# Altium PCB 00.Main.PcbDoc
Units mm, origin at the board's own origin, x right, y up, seen from the top; angles counter-clockwise.
Board outline 141 x 110 mm, 2 copper layers (Top Layer, Bottom Layer); 14 components, 21 nets, 69 pads, 14 vias.
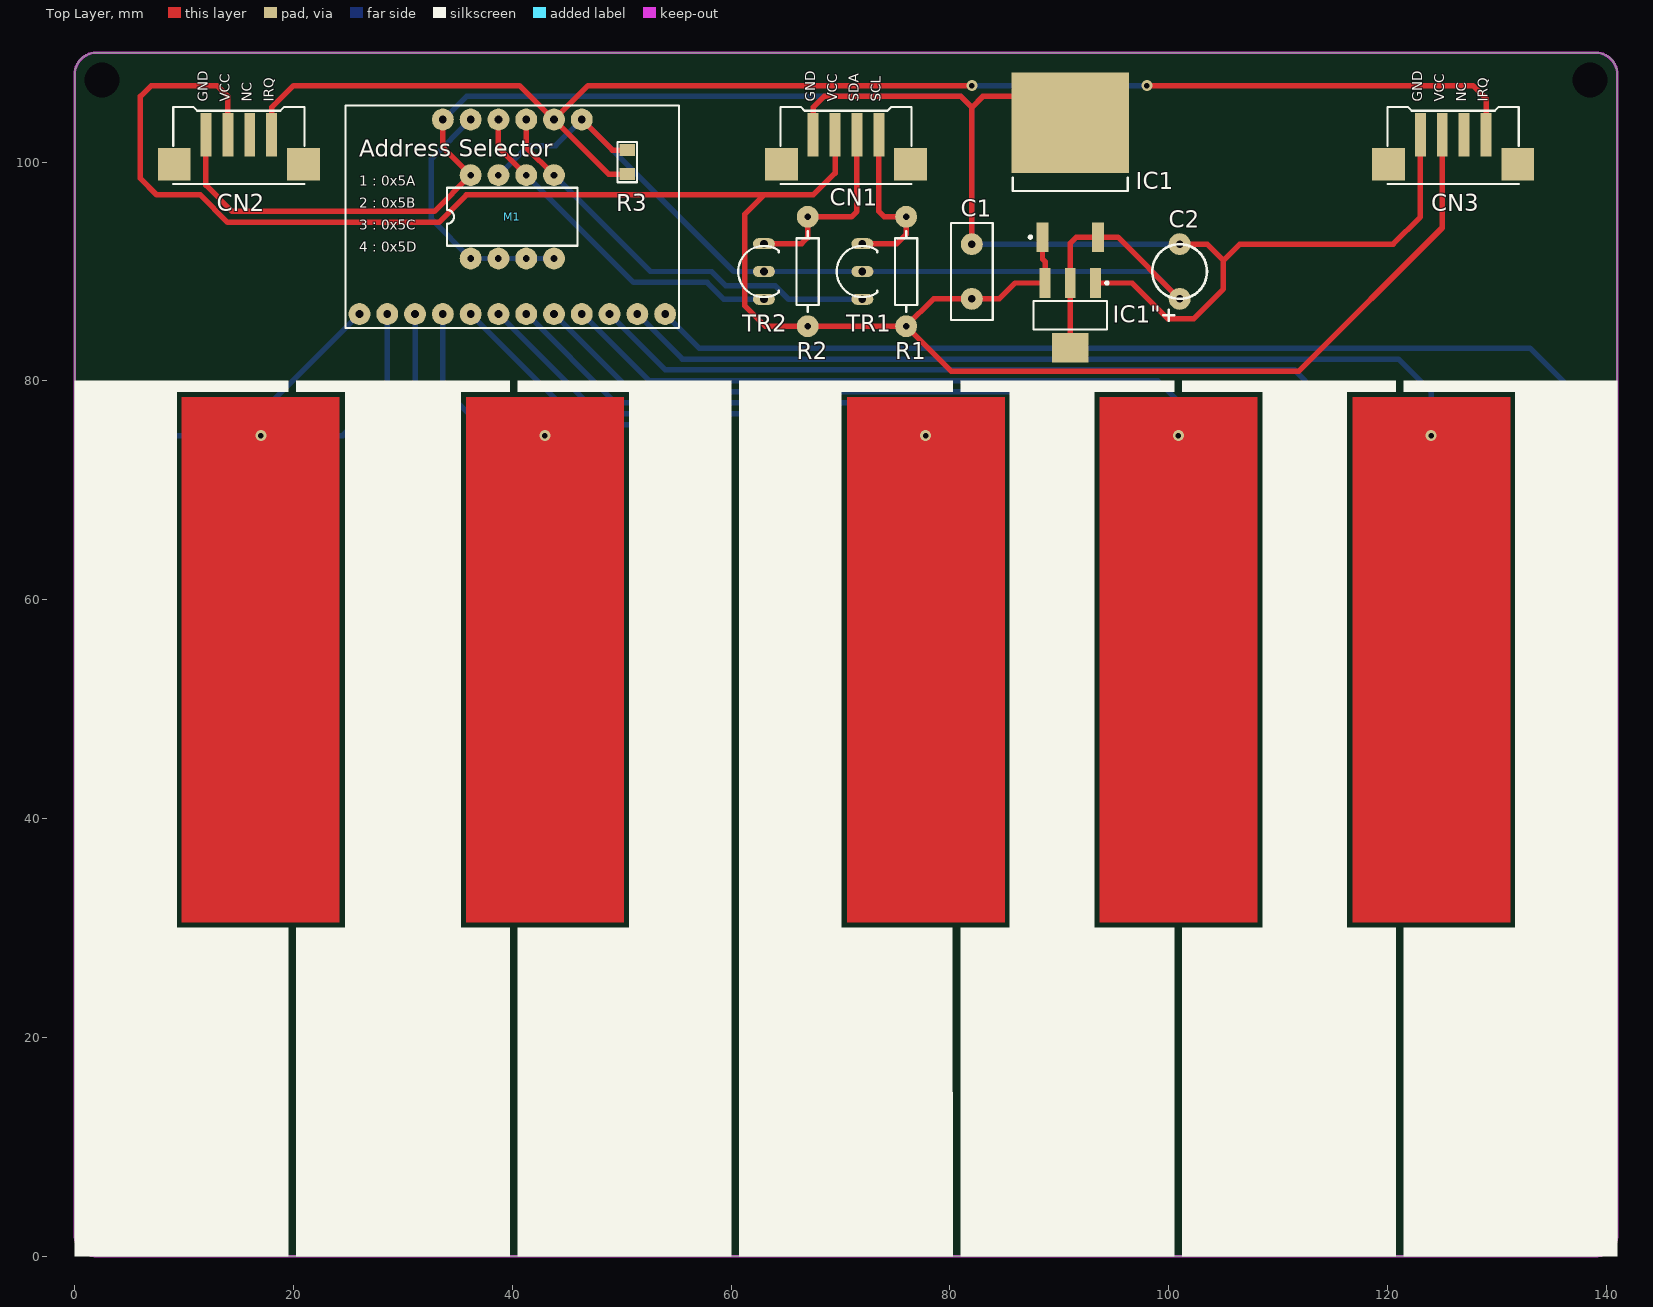
[diagram p0: Top Layer view]
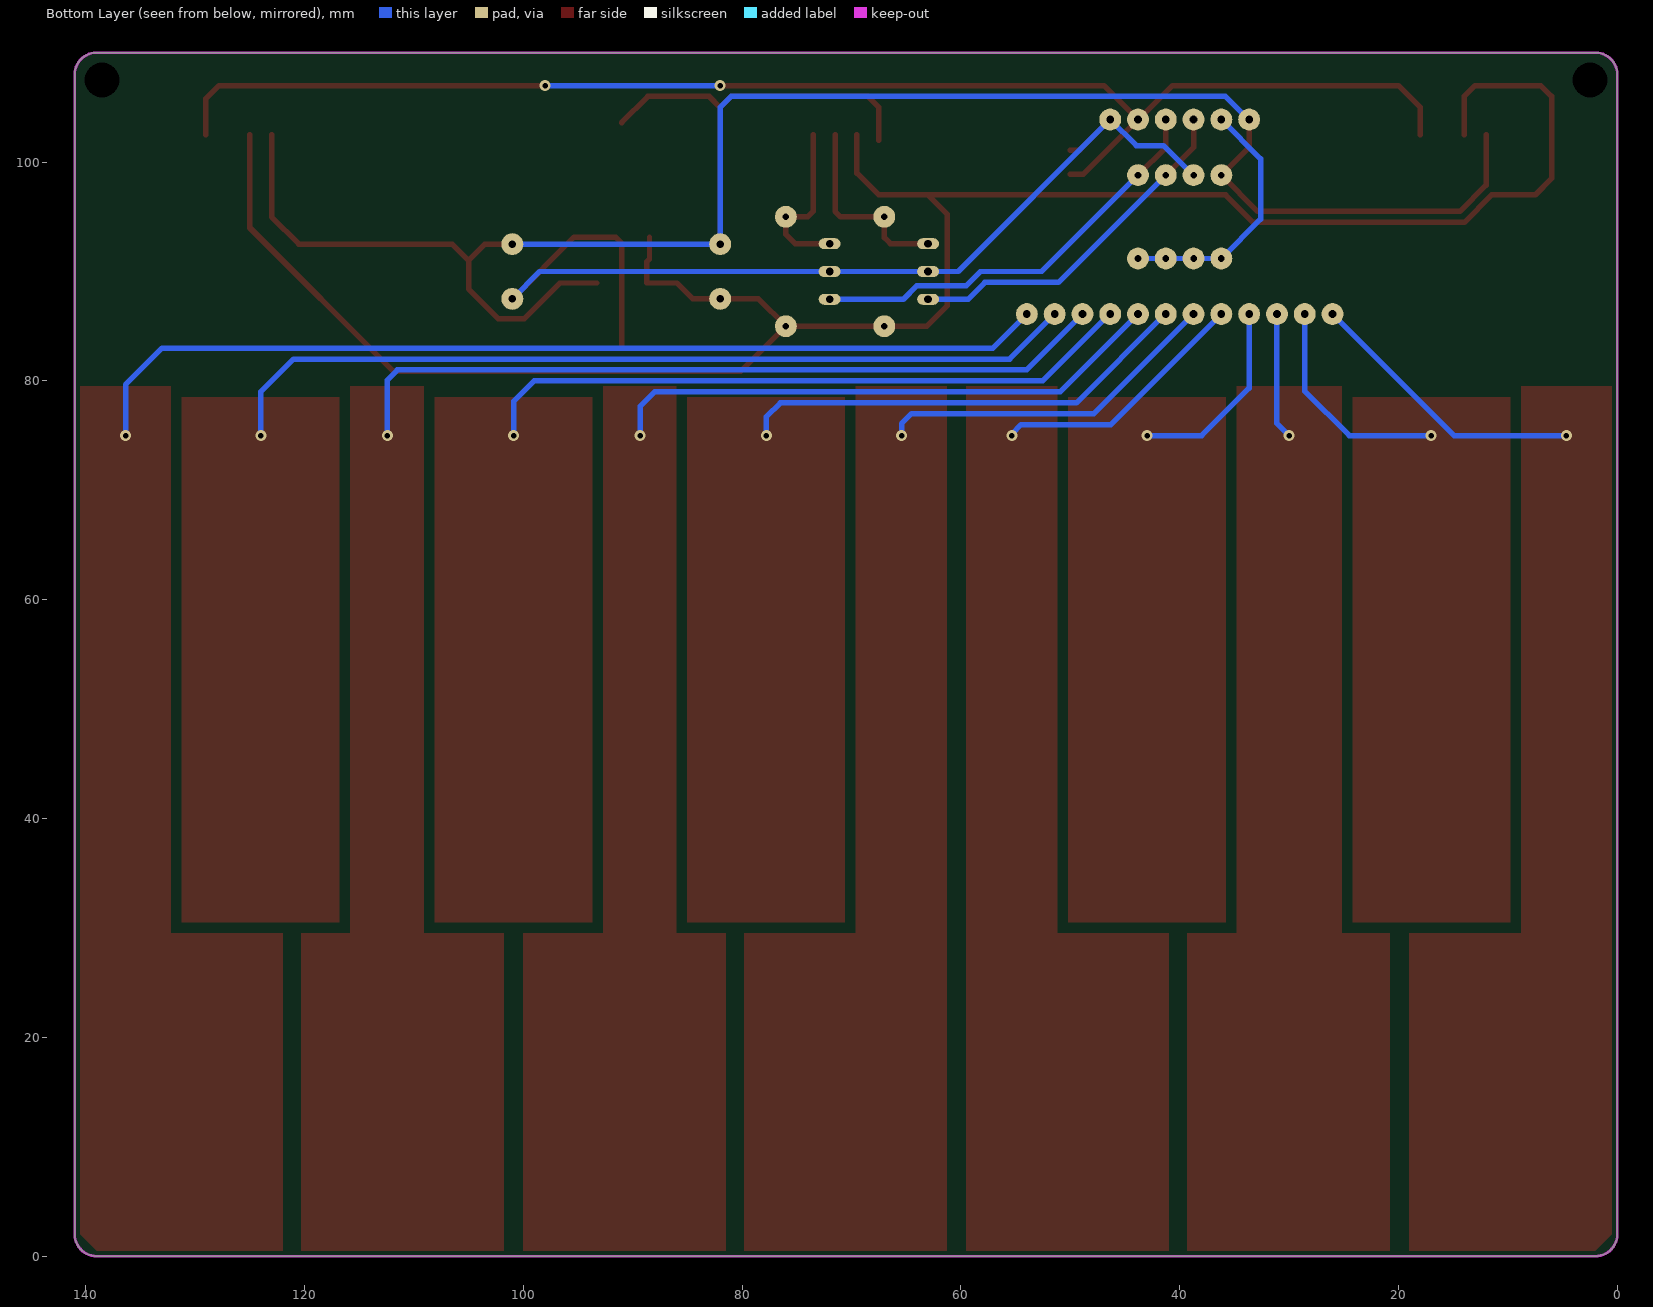
[diagram p1: Bottom Layer view, seen from below]

## Layer stack, top to bottom
Top Layer: signal copper 0.0356
Dielectric: dielectric 0.32, FR-4, Dk 4.8
Bottom Layer: signal copper 0.0356

## Board outline
0,2 0,108 cw(c2,108) 2,110 139,110 cw(c139,108) 141,108 141,2 cw(c139,2) 139,0 2,0 cw(c2,2)

## Design rules (kind name [scope] priority, off if disabled: settings)
Clearance [All] p1: gap=0.3
ComponentClearance [All] p1 off: gap=0.254 collisioncheckmode=3 verticalgap=0.254 showdistances=FALSE
HoleSize [All] p1: absolutevalues=TRUE maxlimit=30 minlimit=0.3 maxpercent=80.000 minpercent=20.000
PolygonConnect [All] p1: connectstyle=Relief reliefconductorwidth=0.5 reliefentries=4 polygonreliefangle="90 Angle" airgapwidth=0.5
RoutingVias [All] p1: holewidth=0.5 width=1 viastyle="Through Hole" minholewidth=0.5 minwidth=1 maxholewidth=0.5 maxwidth=1
SilkToSilkClearance [All] p1: silktosilkclearance=0
SilkToSolderMaskClearance [IsPad] p1: minsilkscreentomaskgap=0 clearancetoexposedcopper=TRUE
SolderMaskExpansion [All] p1: expansion=0.102
Width [All] p1: maxlimit=0.6 minlimit=0.3 preferedwidth=0.5 minimp=50.000000 maximp=50.000000 favimp=50.000000
24 further rules are at their usual default settings.

## Components (designator, comment, footprint, x,y, rotation, side; value= is the part's Value field where it differs from the comment)
"Address Selector" "SW DIP-4" DIP-8 40,95 r90 top locked
C1 "0.1uF" "Cap NP 5mm" 82,90 r270 top
C2 "10uF" "Cap 5mm" 101,90 r90 top
CN1 "Grove" GROVE-4P-180D 70.5,102.5 r0 top locked (schematic designator CN3)
CN2 "Grove" Grove-4P-180D 15,102.5 r0 top
CN3 "Grove" Grove-4P-180D 126,102.5 r0 top
IC1 "uPC2933BT" D2PAK_M 91,100 r90 top
"IC1\"" "LD1117-3V3" sot223_M 91,86 r270 top
M1 "MPR121 Breakout" "MPR121 Breakout" 40,95 r270 top locked
R1 "4.7K" "Res 1/4W" 76,90 r270 top
R2 "4.7K" "Res 1/4W" 67,90 r270 top
R3 "2.2K" 0805 50.5,100 r90 top
TR1 "MOSFET-N" TO-92 72,90 r90 top
TR2 "MOSFET-N" TO-92 63,90 r90 top

## Footprints (in the part's own frame and the unit in brackets; to place one, negate y for a bottom-side part, rotate by r counter-clockwise, add the part's x,y. Pads: shape width x height; smd on the part's side, far side on the other; paste and mask are expansions set on the pad)
0805 [mm]
  rect 1.1x1.4 smd: 1(-1.1,0) 2(1.1,0)
  silkscreen extent -1.85,-0.9 1.85,0.9
"Cap 5mm" [mm]
  round 2 hole 0.7: 1(-2.5,0) 2(2.5,0)
  silkscreen extent -4.5,-2.5 2.5,2.5
"Cap NP 5mm" [mm]
  round 2 hole 0.7: 1(-2.5,0) 2(2.5,0)
  silkscreen extent -4.44,-1.91 4.45,1.9
D2PAK_M [mm] "D2-PAK, 4-Leads, Body 8.8x10.4mm, Pitch 2.54mm, Lead Span 15.1mm, IPC Low Density"
  rect 9.2x10.7 smd: GND(3.6,0)
  rect 2.7x1.1 smd: VIN(-6.85,2.54) VOUT(-6.85,-2.54)
  silkscreen extent -6.97,-5.25 -1.4,5.25
DIP-8 [mm]
  round 2 hole 0.6: 1(-3.81,3.81) 2(-3.81,1.27) 3(-3.81,-1.27) 4(-3.81,-3.81) 5(3.81,-3.81) 6(3.81,-1.27) 7(3.81,1.27) 8(3.81,3.81)
  silkscreen extent -2.65,-5.97 2.65,5.97
GROVE-4P-180D [mm]
  rect 1x4 smd: 1(3,0) 2(1,0) 3(-1,0) 4(-3,0)
  rect 3x3 smd: ""(-5.9,-2.7) ""(5.9,-2.7)
  silkscreen extent -6,-4.5 6,2.55
Grove-4P-180D [mm]
  rect 1x4 smd: 1(3,0) 2(1,0) 3(-1,0) 4(-3,0)
  rect 3x3 smd: ""(-5.9,-2.7) ""(5.9,-2.7)
  silkscreen extent -6,-4.5 6,2.55
"MPR121 Breakout" [mm]
  round 2 hole 0.7: 1(-8.89,6.35) 2(-8.89,3.81) 3(-8.89,1.27) 4(-8.89,-1.27) 5(-8.89,-3.81) 6(-8.89,-6.35) 7(8.89,-13.97) 8(8.89,-11.43) 9(8.89,-8.89) 10(8.89,-6.35) 11(8.89,-3.81) 12(8.89,-1.27) 13(8.89,1.27) 14(8.89,3.81) 15(8.89,6.35) 16(8.89,8.89) 17(8.89,11.43) 18(8.89,13.97)
  silkscreen extent -10.16,-15.24 10.16,15.24
"Res 1/4W" [mm]
  round 2 hole 0.6: 1(-5,0) 2(5,0)
  silkscreen extent -3.7,-1.02 3.7,1.02
sot223_M [mm] "SOT223, 4-Leads, Body 6.5x3.5mm, Pitch 2.3mm, Lead Span 7mm, IPC Low Density"
  rect 2.7x1 smd: GND(-2.95,2.3) VIN(-2.95,-2.3) VOUT(-2.95,0)
  rect 2.7x3.3 smd: VOUT(2.95,0)
  silkscreen extent -3.07,-3.35 1.3,3.48
TO-92 [mm] "TO, Flat Index; 3 In-Line, Axial Leads; Body Dia. 4.6mm; Leads 0.41 x 0.39 mm (max)"
  oval 1x2 hole 0.7: 1(-2.54,0) 2(0,0) 3(2.54,0)
  silkscreen extent -2.34,-1.35 2.34,2.34

## Part data
"Address Selector": "DIP Switch, 4 Position, SPST"
C1: library part "Capacitor Non-Polar"
C2: library part "Capacitor Polar"
CN1 CN2 CN3: library part "Connector 1X4"
IC1 "IC1\"": library part "Volt Reg_1", "Voltage Regulator"
R1 R2 R3: library part Resistor
TR1 TR2: "N-Channel MOSFET"

## Free pads (board coordinates)
  round 0 hole 3.2: 0(2.5,107.5) 0(138.5,107.5)

## Via types
v1: diameter 1, hole 0.5, Top Layer to Bottom Layer, 14 vias

## Nets (pads, with @x,y where several pads share a name; then routed paths per layer and width w, separated by ;. In a path a pad name is that pad's centre, name@x,y a point inside that pad or via, vN(x,y) a via of type N, cw(c..) or ccw(c..) an arc to the next point about the centre after c; other vN are vias at no path point)
3V3: "Address Selector.7" "IC1\".VOUT" C2.1 IC1.VOUT M1.1 R3.2 TR1.2 TR2.2 | length 98.1
  Top Layer w0.5: M1.1 49.14,101.1 R3.2@50,101.1 ; 91,83.05 91,88.95 91,92.6 91.55,93.15 IC1.VOUT 95.35,93.15 C2.1
  Bottom Layer w0.5: 38.73,98.81 38.795,98.81 41.485,101.5 43.96,101.5 M1.1 60.24,90 TR2.2 TR1.2 98.5,90 C2.1
5V: "IC1\".VIN" C1.2 CN1.3 CN2.3 CN3.3 IC1.VIN R1.2 R2.2 | length 200
  Top Layer w0.5: CN2.3 14,106 13,107 7,107 6,106 6,98.5 7.5,97 11.486,97 13.986,94.5 33.294,94.5 35.794,97 63,97 ; CN1.3 69.5,99 67.5,97 63,97 ; IC1.VIN 88.46,91.14 88.7,90.9 88.7,88.95 85.95,88.95 84.5,87.5 C1.2 78.5,87.5 R1.2 ; CN3.3 125,94 111.9,80.9 80.1,80.9 R1.2 ; 63,97 61.25,95.25 61.25,86.85 63.1,85 R2.2 R1.2
ADD: "Address Selector.1" "Address Selector.2" "Address Selector.3" "Address Selector.4" M1.5 | length 23.3
  Bottom Layer w0.5: M1.5 32.6,100.3 32.6,94.78 36.19,91.19 38.73,91.19 41.27,91.19 43.81,91.19
GND: "Address Selector.8" "IC1\".GND" C1.1 C2.2 CN1.4 CN2.4 CN3.4 IC1.GND M1.6 | length 210.7
  Top Layer w0.5: CN2.4 12,97.9 14.4,95.5 32.88,95.5 36.19,98.81 33.65,101.35 M1.6 ; CN1.4@67.5,102 67.5,105 ; CN1.4 67.5,105 ; C1.1 82,105 ; IC1.GND 88.6,106 83,106 82,105 ; 93.3,88.95 96.65,88.95 99.9,85.7 102.3,85.7 105,88.4 105,91 ; C2.2 103.5,92.5 105,91 ; CN3.4 123,95 120.5,92.5 106.5,92.5 105,91 ; 67.5,105 68.5,106 81,106 82,105
  Bottom Layer w0.5: M1.6 33.715,103.89 35.825,106 81,106 82,105 C1.1 C2.2
IRQ: CN2.1 CN3.1 M1.2 R3.1 | length 129
  Top Layer w0.5: CN2.1 18,105 20,107 40.635,107 43.745,103.89 M1.2 ; R3.1@50,98.9 48.8,98.9 M1.2 ; v1(82,107) 46.92,107 M1.2 ; v1(98,107) 127.8,107 129,105.8 CN3.1
  Bottom Layer w0.5: v1@82,107 v1(98,107)
KEY1: M1.7 | length 26
  Bottom Layer w0.5: v1(4.663,75) 14.92,75 M1.7
KEY2: M1.8 | length 20.3
  Bottom Layer w0.5: v1(17.025,75) 24.5,75 28.57,79.07 M1.8
KEY3: M1.9 | length 11.6
  Bottom Layer w0.5: v1(30,75) 31.11,76.11 M1.9
KEY4: M1.10 | length 17.9
  Bottom Layer w0.5: M1.10 33.65,79.35 38,75 v1(42.975,75)
KEY5: M1.11 | length 23.8
  Bottom Layer w0.5: M1.11 46.3,76 54.5,76 55.337,75.163 v1(55.337,75)
KEY6: M1.12 | length 31.9
  Bottom Layer w0.5: M1.12 47.84,77 64.5,77 65.413,76.087 v1(65.413,75)
KEY7: M1.13 | length 42.1
  Bottom Layer w0.5: M1.13 41.335,86.11 49.445,78 76.5,78 77.775,76.725 v1(77.775,75)
KEY8: M1.14 | length 51.7
  Bottom Layer w0.5: M1.14 50.92,79 88,79 89.325,77.675 v1(89.325,75)
KEY9: M1.15 | length 61
  Bottom Layer w0.5: M1.15 46.415,86.11 52.525,80 99,80 100.875,78.125 v1(100.875,75)
KEY10: M1.16 | length 71.1
  Bottom Layer w0.5: M1.16 54,81 111.5,81 112.425,80.075 v1(112.425,75)
KEY11: M1.17 | length 79.5
  Bottom Layer w0.5: M1.17 55.54,82 121,82 123.975,79.025 v1(123.975,75)
KEY12: M1.18 | length 89.7
  Bottom Layer w0.5: M1.18 57.08,83 133,83 136.337,79.663 v1(136.337,75)
SCL_3V3: "Address Selector.5" M1.3 TR1.1 | length 39
  Top Layer w0.5: M1.3 41.27,101.35 43.81,98.81
  Bottom Layer w0.5: 43.81,98.81 52.62,90 58.214,90 59.504,88.71 64.018,88.71 65.268,87.46 TR1.1
SCL_5V: CN1.1 R1.1 TR1.3 | length 15.7
  Top Layer w0.5: TR1.3 75.14,92.54 76,93.4 R1.1 74,95 73.5,95.5 CN1.1
SDA_3V3: "Address Selector.6" M1.4 TR2.1 | length 32.6
  Top Layer w0.5: M1.4 38.73,101.35 41.27,98.81
  Bottom Layer w0.5: 41.27,98.81 51.08,89 57.8,89 59.34,87.46 TR2.1
SDA_5V: CN1.2 R2.1 TR2.3 | length 17.8
  Top Layer w0.5: TR2.3 66.44,92.54 67,93.1 R2.1 71,95 71.5,95.5 CN1.2
pads on no net: CN1. CN2. CN2.2 CN3. CN3.2

## Keep-outs
Keep-Out Layer:
  the board outline again, w0.254

## Other copper
Top Layer:
  region net KEY12: 122,0.5 139,0.5 140.5,2 140.5,79.5 132.2,79.5 132.2,29.5 122,29.5
  region net KEY1: 19,0.5 2,0.5 0.5,2 0.5,79.5 8.8,79.5 8.8,29.5 19,29.5
  region net KEY10: 115.8,79.5 109.1,79.5 109.1,29.5 101.8,29.5 101.8,0.5 120.3,0.5 120.3,29.5 115.8,29.5
  region net KEY8: 86,79.5 92.7,79.5 92.7,29.5 100,29.5 100,0.5 81.5,0.5 81.5,29.5 86,29.5
  region net KEY3: 25.2,79.5 34.8,79.5 34.8,29.5 39.3,29.5 39.3,0.5 20.8,0.5 20.8,29.5 25.2,29.5
  region net KEY11: 116.8,78.5 131.2,78.5 131.2,30.5 116.8,30.5
  region net KEY9: 93.7,78.5 108.1,78.5 108.1,30.5 93.7,30.5
  region net KEY7: 70.6,78.5 85,78.5 85,30.5 70.6,30.5
  region net KEY4: 35.8,78.5 50.2,78.5 50.2,30.5 35.8,30.5
  region net KEY6: 61.3,0.5 79.8,0.5 79.8,29.5 69.6,29.5 69.6,79.5 61.3,79.5
  region net KEY5: 59.5,0.5 41,0.5 41,29.5 51.2,29.5 51.2,79.5 59.5,79.5
  region net KEY2: 9.8,78.5 24.2,78.5 24.2,30.5 9.8,30.5

## Silkscreen, mask and mechanical layers (free items; w line width, h text height)
Top Overlay:
  region: 0,80 19.5,80 19.5,79 9.325,79 9.325,30 19.5,30 19.5,0 0,0
  region: 60,80 40.5,80 40.5,79 50.675,79 50.675,30 40.5,30 40.5,0 60,0
  region: 141,80 121.5,80 121.5,79 131.675,79 131.65,30 121.5,30 121.5,0 141,0
  region: 60.75,80 80.25,80 80.25,79 70.075,79 70.075,30 80.225,30 80.25,0 60.75,0
  region: 20.25,80 20.25,79 24.725,79 24.725,30 20.25,30 20.25,0 39.75,0 39.75,30 35.275,30 35.275,79 39.75,79 39.75,80
  region: 81,80 100.5,80 100.5,79 93.175,79 93.175,30 100.5,30 100.5,0 81,0 81,30 85.475,30 85.475,79 81,79
  region: 101.25,80 120.75,80 120.75,79 116.275,79 116.275,30 120.75,30 120.75,0 101.25,0 101.25,30 108.575,30 108.575,79 101.25,79
  text "GND" at 12.5,105.5 h1.52 r90
  text "VCC" at 14.5,105.5 h1.52 r90
  text "NC" at 16.5,105.5 h1.52 r90
  text "IRQ" at 18.5,105.5 h1.52 r90
  text "GND" at 68,105.5 h1.52 r90
  text "VCC" at 70,105.5 h1.52 r90
  text "SDA" at 72,105.5 h1.52 r90
  text "SCL" at 74,105.5 h1.52 r90
  text "GND" at 123.5,105.5 h1.52 r90
  text "VCC" at 125.5,105.5 h1.52 r90
  text "NC" at 127.5,105.5 h1.52 r90
  text "IRQ" at 129.5,105.5 h1.52 r90
  text "1 : 0x5A" at 26,97.5 h1.52
  text "2 : 0x5B" at 26,95.5 h1.52
  text "3 : 0x5C" at 26,93.5 h1.52
  text "4 : 0x5D" at 26,91.5 h1.52
Mechanical 1:
  lines w0.2: 19.5,0 19.5,30 9.325,30 9.325,79 19.5,79 19.5,80 0,80 0,2 ccw(c2,2) 2,0 139,0 ccw(c139,2) 141,2 141,80 121.5,80 121.5,79 131.675,79 131.675,30 121.5,30 121.5,0 ; 20.25,0 20.25,30 24.725,30 24.725,79 20.25,79 20.25,80 39.75,80 39.75,79 35.275,79 35.275,30 39.75,30 39.75,0 ; 40.5,0 40.5,30 50.675,30 50.675,79 40.5,79 40.5,80 60,80 60,0 ; 60.75,0 60.75,80 80.25,80 80.25,79 70.075,79 70.075,30 80.25,30 80.25,0 ; 81,0 81,30 85.475,30 85.475,79 81,79 81,80 100.5,80 100.5,79 93.175,79 93.175,30 100.5,30 100.5,0 ; 101.25,0 101.25,30 108.575,30 108.575,79 101.25,79 101.25,80 120.75,80 120.75,79 116.275,79 116.275,30 120.75,30 120.75,0
Mechanical 3:
  circle w0.2: c2.5,107.5 r1.3
  circle w0.2: c138.5,107.5 r1.3
  circle w0.2: c2.5,83 r1.3
  circle w0.2: c138.5,83 r1.3
  lines w0.2: -3.008,1.274 -2.5,-0.25 ; -3.008,108.726 -2.5,110.25 ; -2.754,-0.25 -2.246,-0.25 ; -2.754,110.25 -2.246,110.25 ; -2.5,47.992 -2.5,-0.25 ; -2.5,62.008 -2.5,110.25 ; -1.992,1.274 -2.5,-0.25 ; -1.992,108.726 -2.5,110.25 ; -0.25,112.246 -0.25,112.754 ; 1.274,111.992 -0.25,112.5 ; 1.274,113.008 -0.25,112.5 ; 63.492,112.5 -0.25,112.5 ; 77.508,112.5 141.25,112.5 ; 139.726,111.992 141.25,112.5 ; 139.726,113.008 141.25,112.5 ; 141.25,112.246 141.25,112.754 ; -0.25,2 ccw(c2,2) 2,-0.25 139,-0.25 ccw(c139,2) 141.25,2 141.25,108 ccw(c139,108) 139,110.25 2,110.25 ccw(c2,108) -0.25,108 -0.25,2 ; 25,84.22 cw(c26.89,86.11) 25,88 55,88 cw(c53.11,86.11) 55,84.22 25,84.22 ; 32.5,102.28 cw(c34.11,103.89) 32.5,105.5 47.5,105.5 cw(c45.89,103.89) 47.5,102.28 32.5,102.28 ; 35,89.5 cw(c36.69,91.19) 35,92.88 45,92.88 cw(c43.31,91.19) 45,89.5 35,89.5 ; 35,97.12 cw(c36.69,98.81) 35,100.5 45,100.5 cw(c43.31,98.81) 45,97.12 35,97.12 ; 61,87 61,93 62,94 63,94 64,94 65,93 65,87 64,86 63,86 62,86 61,87 ; 68.803,85 ccw(c67,85) 68.803,85 ; 68.803,95 ccw(c67,95) 68.803,95 ; 70,87 70,93 71,94 72,94 73,94 74,93 74,87 73,86 72,86 71,86 70,87 ; 77.803,85 ccw(c76,85) 77.803,85 ; 77.803,95 ccw(c76,95) 77.803,95 ; 83.803,87.5 ccw(c82,87.5) 83.803,87.5 ; 83.803,92.5 ccw(c82,92.5) 83.803,92.5 ; 102.803,87.5 ccw(c101,87.5) 102.803,87.5 ; 102.803,92.5 ccw(c101,92.5) 102.803,92.5
  text "141.5 (mm)" at 63.746,111.586 h1.52
  text "110.5 (mm)" at -1.586,48.246 h1.52 r90